# EAGLE board usbisp_3V3 (EAGLE 6.4)
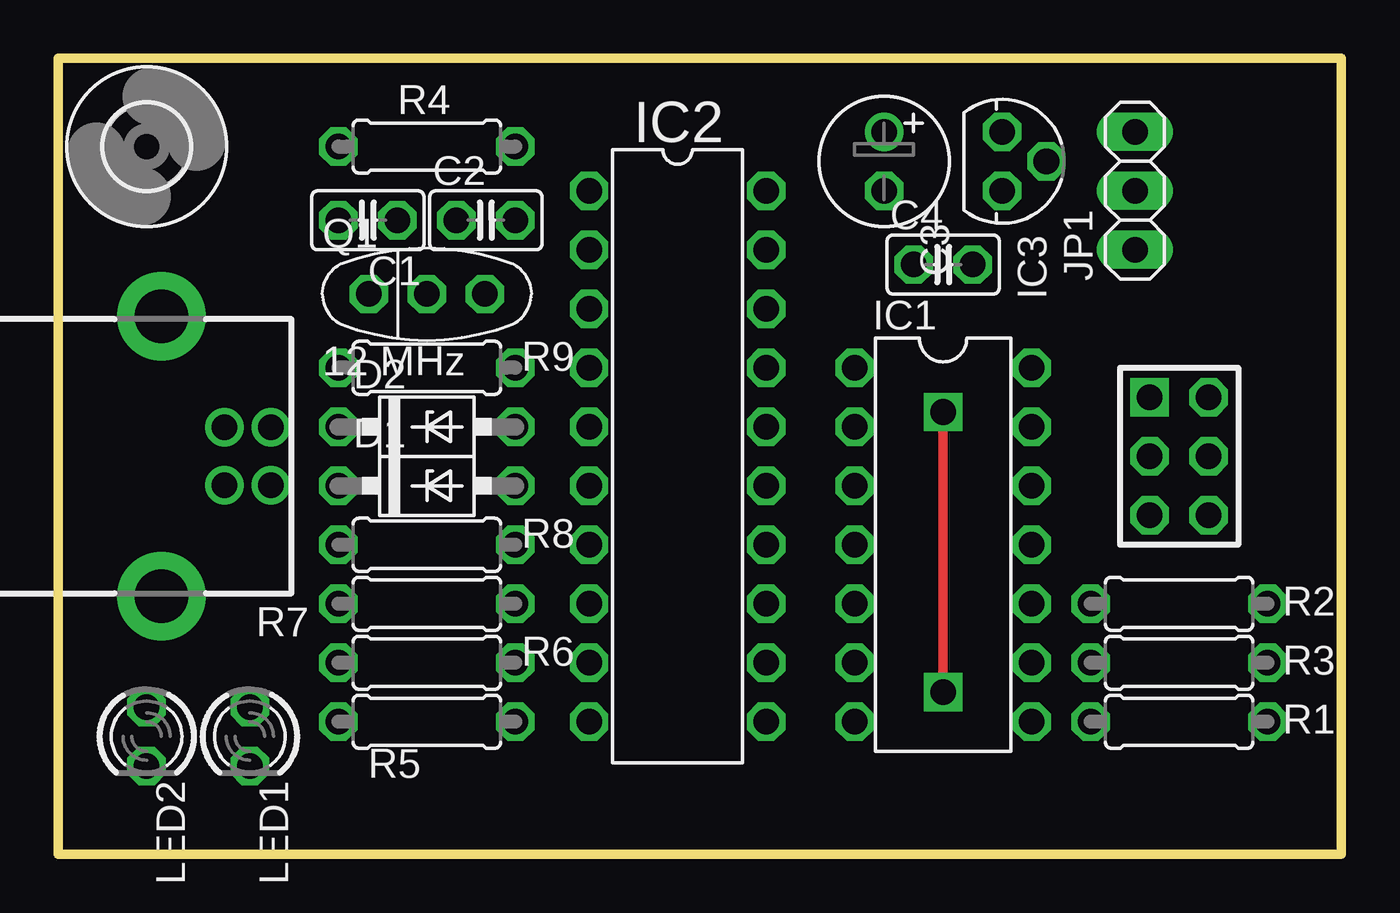
[diagram p0: board, top side]
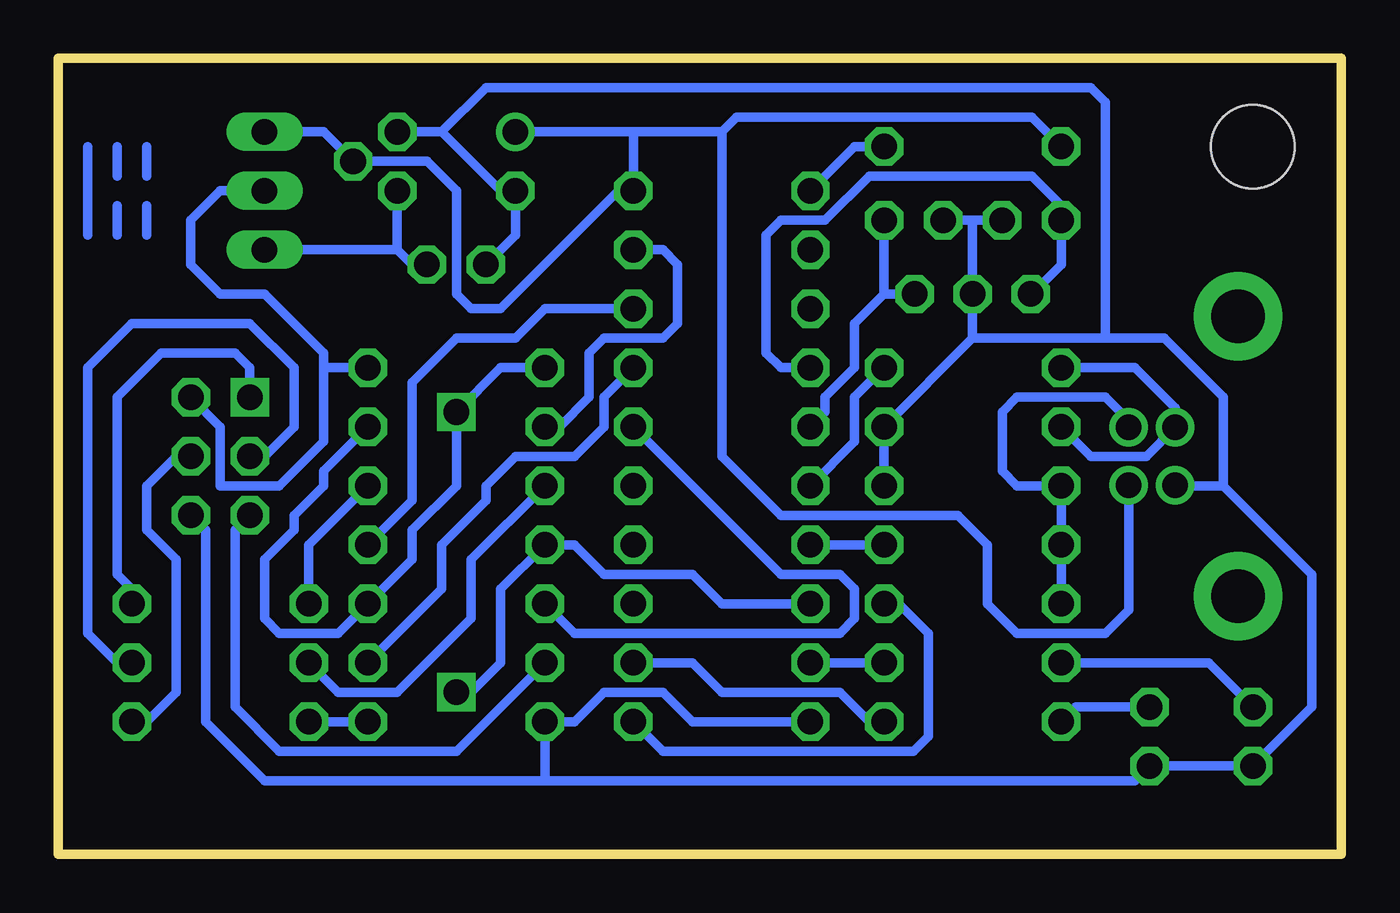
[diagram p1: board, bottom side, seen from below]

Size 55.24 x 34.29 mm. Coordinates in mm from the lower left corner, seen from the top.
Outline: 0,0 0,34.29 55.24,34.29 55.24,0 0,0
Copper layers (1*16): Top 0.035mm / dielectric 1.5mm / Bottom 0.035mm
Design rules "default": minimum track width 10mil, minimum drill 24mil, track to track 8mil, track to pad 8mil, pad to pad 8mil, via to via 8mil, smd to smd 8mil, copper to edge 40mil, drill to drill 8mil, minimum pad ring 10mil, minimum via ring 8mil, stop-mask expansion 4mil, vias tented up to drill 0mil, thermal gap 10mil

## Footprints (pad centres in the part's own frame; a part is rotated, then mirrored left to right if it is on the bottom)
C025-025X050 = drill 1.1 octagon: 1 -1.27,0; 2 1.27,0
E2,5-6 = drill 1.1: + -1.27,0 | drill 1.1 pad 1.6 octagon: - 1.27,0
DO41Z10 = drill 1.1 octagon: A 3.81,0; C -3.81,0
DIL14 = drill 1.1 octagon: 1 -7.62,-3.81; 2 -5.08,-3.81; 3 -2.54,-3.81; 4 0,-3.81; 5 2.54,-3.81; 6 5.08,-3.81; 7 7.62,-3.81; 8 7.62,3.81; 9 5.08,3.81; 10 2.54,3.81; 11 0,3.81; 12 -2.54,3.81; 13 -5.08,3.81; 14 -7.62,3.81
DIL20 = drill 1.1 octagon: 1 -11.43,-3.81; 2 -8.89,-3.81; 3 -6.35,-3.81; 4 -3.81,-3.81; 5 -1.27,-3.81; 6 1.27,-3.81; 7 3.81,-3.81; 8 6.35,-3.81; 9 8.89,-3.81; 10 11.43,-3.81; 11 11.43,3.81; 12 8.89,3.81; 13 6.35,3.81; 14 3.81,3.81; 15 1.27,3.81; 16 -1.27,3.81; 17 -3.81,3.81; 18 -6.35,3.81; 19 -8.89,3.81; 20 -11.43,3.81
MCP1700-330 = drill 1.1 octagon: GND -1.27,0; IN 0,1.905; OUT 1.27,0
1X03 = drill 1.1 long: 1 -2.54,0; 2 0,0; 3 2.54,0
AVR-ISP-6 = drill 1.1 square: 1 -2.54,-1.27 | drill 1.1 octagon: 2 -2.54,1.27; 3 0,-1.27; 4 0,1.27; 5 2.54,-1.27; 6 2.54,1.27
LED3MM = drill 1.1 octagon: A -1.27,0; K 1.27,0
CSTLS_G9 = drill 1.1 octagon: 1 -2.5,0; 2 0,0; 3 2.5,0
0207/7 = drill 1.1 octagon: 1 -3.81,0; 2 3.81,0
3,6 = hole 3.6: 0,0
USB-B = drill 1.1: 1 1.25,4.71; 2 -1.25,4.71; 3 -1.25,2.71; 4 1.25,2.71 | drill 2.3 pad 3.81: S1 -6.02,0; S2 6.02,0

## Placement (x,y rotation side)
C1  22pF  [C025-025X050]  13.34,27.3 180 top
C2  22pF  [C025-025X050]  18.41,27.3 0 top
C3  100uF/16V  [E2,5-6]  35.56,29.84 270 top
C4  0.1uF  [C025-025X050]  38.1,25.4 0 top
D1  3.6V  [DO41Z10]  15.88,15.88 0 top
D2  3.6V  [DO41Z10]  15.88,18.41 0 top
IC1  74HC125N  [DIL14]  38.1,13.34 270 top
IC2  ATTINY2313  [DIL20]  26.67,17.14 270 top
IC3  MCP1700-330  [MCP1700-330]  40.64,29.84 270 top
JP1  [1X03]  46.35,28.57 90 top
JP2  AVR-ISP-6  [AVR-ISP-6]  48.26,17.14 270 top
LED1  Red  [LED3MM]  8.26,5.08 270 top
LED2  Green  [LED3MM]  3.81,5.08 270 top
Q1  12 MHz  [CSTLS_G9]  15.88,24.13 0 top
R1  330  [0207/7]  48.26,5.71 180 top
R2  330  [0207/7]  48.26,10.79 180 top
R3  330  [0207/7]  48.26,8.26 180 top
R4  10k  [0207/7]  15.88,30.48 0 top
R5  1k  [0207/7]  15.88,5.71 180 top
R6  1k  [0207/7]  15.88,8.26 180 top
R7  1.5k  [0207/7]  15.88,10.79 180 top
R8  27  [0207/7]  15.88,13.34 180 top
R9  27  [0207/7]  15.88,20.95 180 top
U$4  [3,6]  3.81,30.48 0 top
U$5  [LOGO-COPPER]  53.98,26.67 90 top
X1  USBB  [USB-B]  4.45,17.14 270 top

## Library data of the parts
C1-C4 D1 D2 IC1-IC3 JP1 JP2 LED1 LED2 Q1 R1-R9 U$4 X1 = USBISP
U$5 = logo

## Nets
+3V3: C4.2 IC3.OUT JP1.1
+5V: C3.+ IC2.20 IC3.IN JP1.3 R4.1 X1.1
EN: IC1.1 IC1.4 IC1.10 IC1.13 IC2.8
GND: C1.1 C2.1 C3.- C4.1 D1.A D2.A IC1.7 IC2.10 IC3.GND JP2.6 LED1.K LED2.K Q1.2 X1.4
MISO: JP2.1 R2.1
MISO': IC1.11 IC2.18
MOSI: JP2.4 R1.1
MOSI': IC1.9 IC2.17
N$1: C1.2 IC2.4 Q1.1
N$2: C2.2 IC2.5 Q1.3
N$3: IC2.6 R9.1
N$4: IC2.7 R8.1
N$5: D2.C R9.2 X1.3
N$6: D1.C R7.2 R8.2 X1.2
N$7: IC2.11 R7.1
N$8: IC2.9 R6.1
N$9: IC2.12 R5.1
N$10: LED2.A R6.2
N$11: LED1.A R5.2
N$12: IC2.1 R4.2
N$13: IC1.14 JP1.2 JP2.2
N$15: IC1.12 R2.2
N$16: IC1.3 R3.2
N$17: IC1.8 R1.2
RST: IC1.6 JP2.5
RST': IC1.5 IC2.16
SCK: JP2.3 R3.1
SCK': IC1.2 IC2.19

## Tracks (layer width: path | path; a pad name or v marks a point on that pad's centre or on a via)
+3V3
  Bottom 0.406: C4.2 40.01,25.4 40.64,26.04 | 40.64,26.04 IC3.OUT | 40.64,26.04 JP1.1
+5V
  Bottom 0.406: X1.1 9.15,10.53 10.16,9.53 13.97,9.53 15.24,10.79 15.24,13.34 16.51,14.61 24.13,14.61 26.67,17.14 26.67,31.11 | R4.1 13.34,31.75 26.04,31.75 26.67,31.11 | 26.67,31.11 30.48,31.11 | 30.48,31.11 IC2.20 31.11,28.57 36.2,23.5 37.47,23.5 38.1,24.13 38.1,28.57 39.37,29.84 IC3.IN 43.81,31.11 JP1.3 | 30.48,31.11 C3.+
EN  (via drill 1.1)
  Top 0.406: v38.1,6.99 v38.1,19.05
  Bottom 0.406: IC2.8 26.67,10.79 27.94,12.06 31.75,12.06 33.02,13.34 IC1.4 36.2,11.43 36.2,8.26 37.47,6.99 v38.1,6.99 | IC1.1 36.2,20.95 v38.1,19.05 38.1,15.88 40.01,13.97 40.01,12.7 IC1.10 43.18,9.53 45.72,9.53 46.35,10.16 46.35,12.7 45.09,13.97 45.09,14.61 43.81,15.88 43.81,16.51 IC1.13
GND
  Bottom 0.406: 15.88,27.3 Q1.2 15.88,22.23 | 15.88,27.3 C1.1 | 15.88,27.3 C2.1 | 5.08,15.88 1.27,12.06 1.27,6.35 LED2.K LED1.K 8.89,3.17 34.29,3.17 | 5.08,15.88 7.13,15.88 X1.4 | D1.A D2.A 15.88,22.23 | 10.16,22.23 7.62,22.23 5.08,19.68 5.08,15.88 | 10.16,22.23 15.88,22.23 | IC2.10 27.94,5.71 29.21,6.99 31.75,6.99 33.02,5.71 IC1.7 34.29,3.17 | JP2.6 48.9,13.97 48.9,5.71 46.35,3.17 34.29,3.17 | 38.73,31.11 36.2,28.57 C3.- 35.56,26.67 C4.1 | 10.16,22.23 10.16,32.38 10.79,33.02 36.83,33.02 38.73,31.11 | 38.73,31.11 IC3.GND
MISO
  Bottom 0.406: R2.1 52.07,11.43 52.7,12.06 52.7,19.68 50.8,21.59 47.62,21.59 46.99,20.95 JP2.1
MISO'
  Bottom 0.406: IC2.18 34.29,23.5 35.56,22.23 38.1,22.23 40.01,20.32 40.01,15.24 IC1.11
MOSI
  Bottom 0.406: JP2.4 50.16,17.14 51.44,15.88 51.44,13.97 50.16,12.7 50.16,6.99 51.44,5.71 R1.1
MOSI'
  Bottom 0.406: IC1.9 38.73,11.43 38.73,13.34 36.83,15.24 36.83,15.88 35.56,17.14 33.02,17.14 31.75,18.41 31.75,19.68 IC2.17
N$1
  Bottom 0.406: Q1.1 13.34,24.13 12.06,25.4 C1.2 12.06,27.94 13.34,29.21 20.32,29.21 22.23,27.3 24.13,27.3 24.77,26.67 24.77,21.59 24.13,20.95 IC2.4
N$2
  Bottom 0.406: 19.68,24.13 C2.2 | Q1.3 19.68,24.13 | 19.68,24.13 20.95,22.86 20.95,20.95 22.23,19.68 22.23,19.05 IC2.5
N$3
  Bottom 0.406: R9.1 20.95,19.68 20.95,17.78 IC2.6
N$4
  Bottom 0.406: R8.1 IC2.7
N$5
  Bottom 0.406: D2.C 10.79,17.14 8.4,17.14 X1.3 7.16,19.22 8.89,20.95 R9.2
N$6
  Bottom 0.406: R7.2 R8.2 D1.C 13.97,15.88 14.61,16.51 14.61,19.05 13.97,19.68 10.16,19.68 9.15,18.68 X1.2
N$7
  Bottom 0.406: IC2.11 29.21,4.45 18.41,4.45 17.78,5.08 17.78,9.53 19.05,10.79 R7.1
N$8
  Bottom 0.406: R6.1 IC2.9
N$9
  Bottom 0.406: R5.1 20.32,5.71 21.59,6.99 26.67,6.99 27.94,8.26 IC2.12
N$10
  Bottom 0.406: R6.2 5.71,8.26 LED2.A
N$11
  Bottom 0.406: LED1.A 11.43,6.35 R5.2
N$12
  Bottom 0.406: R4.2 20.95,30.48 IC2.1
N$13
  Bottom 0.406: JP2.2 48.26,18.41 48.26,15.88 45.72,15.88 43.81,17.78 43.81,20.95 | 43.81,20.95 IC1.14 | JP1.2 48.26,28.57 49.53,27.3 49.53,25.4 48.26,24.13 46.35,24.13 43.81,21.59 43.81,20.95
N$15
  Bottom 0.406: R2.2 44.45,13.34 IC1.12
N$16
  Bottom 0.406: R3.2 43.18,6.99 40.64,6.99 37.47,10.16 37.47,12.7 IC1.3
N$17
  Bottom 0.406: IC1.8 R1.2
RST
  Bottom 0.406: IC1.6 38.1,4.45 45.72,4.45 47.62,6.35 47.62,13.97 JP2.5
RST'
  Bottom 0.406: IC1.5 33.02,9.53 21.59,9.53 20.95,10.16 20.95,11.43 21.59,12.06 24.13,12.06 IC2.16
SCK
  Bottom 0.406: R3.1 52.7,8.26 53.98,9.53 53.98,20.95 52.07,22.86 46.99,22.86 45.09,20.95 45.09,18.41 46.35,17.14 JP2.3
SCK'
  Bottom 0.406: IC2.19 29.21,26.04 28.57,25.4 28.57,22.86 29.21,22.23 31.75,22.23 32.38,21.59 32.38,19.68 33.66,18.41 IC1.2